# Altium PCB Memory Address Decoder.PcbDoc
Units mil, origin at the board's own origin, x right, y up, seen from the top; angles counter-clockwise.
Board outline 5200 x 2700 mil, 2 copper layers (Top Layer, Bottom Layer), stack 61.756 mil thick; 19 components, 62 nets, 171 pads, 159 vias.
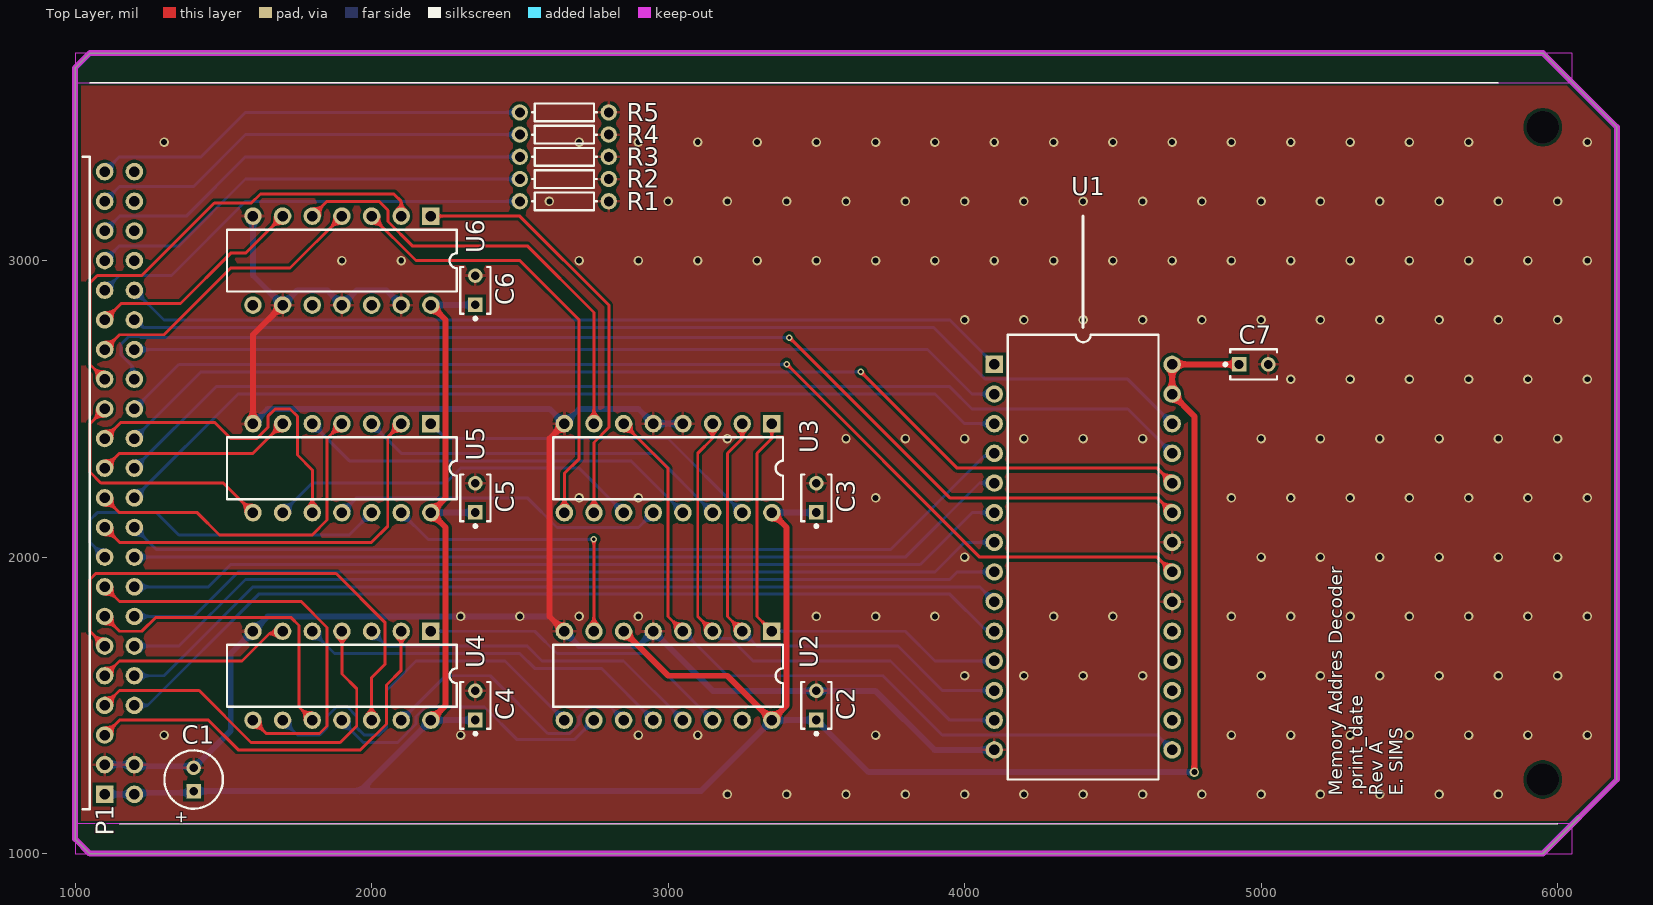
[diagram p0: Top Layer view]
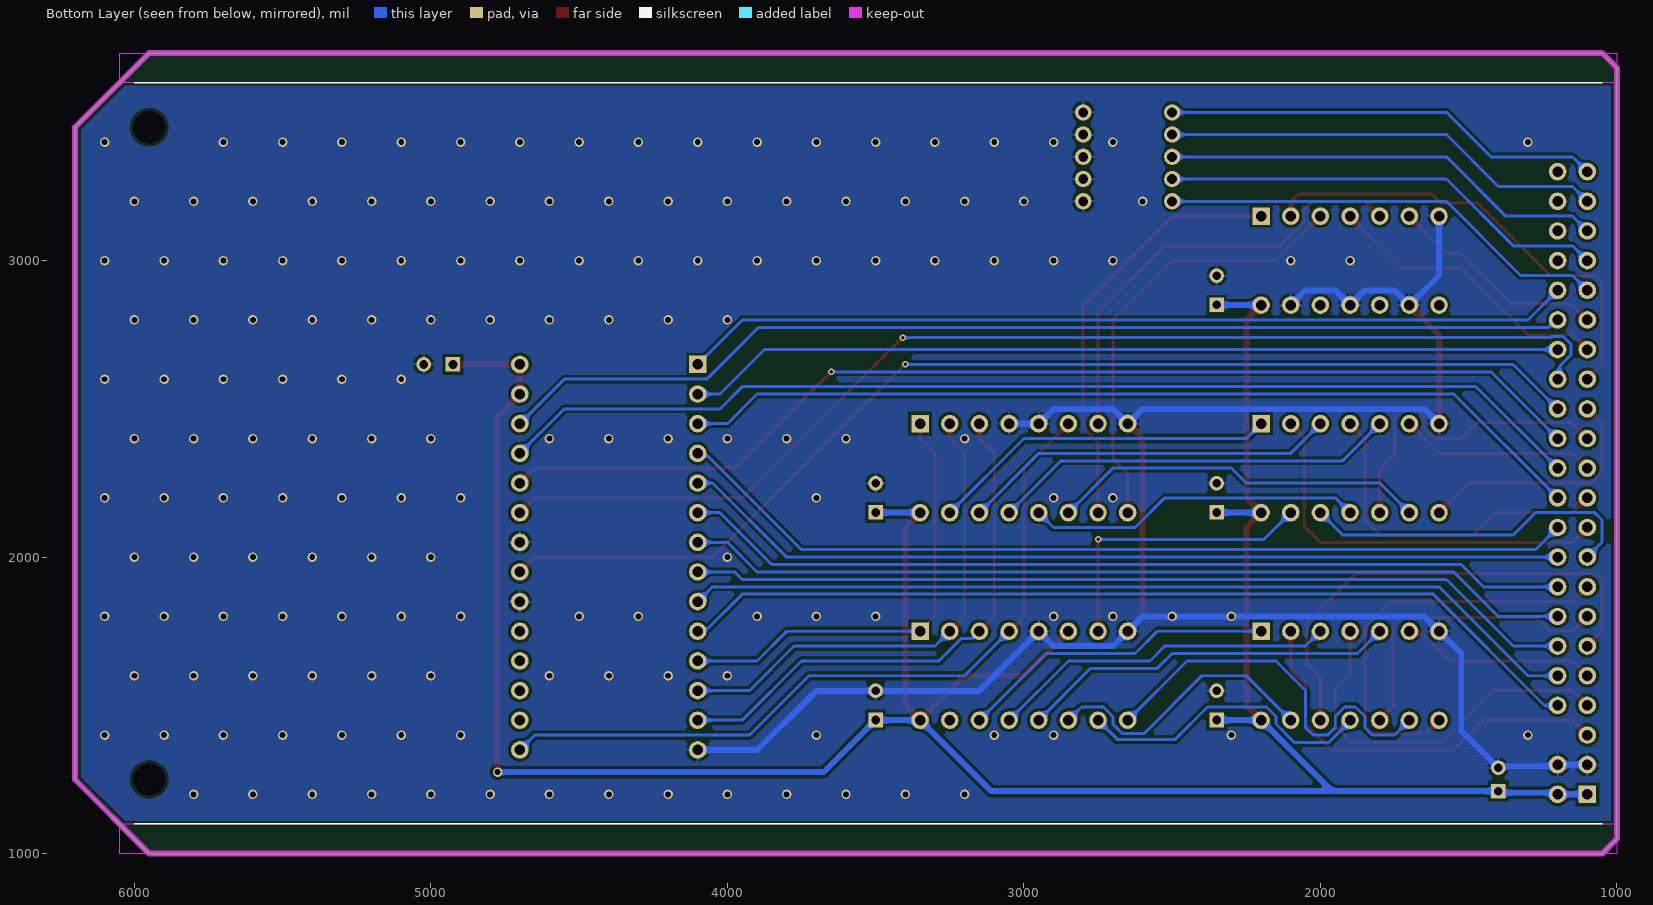
[diagram p1: Bottom Layer view, seen from below]

## Layer stack, top to bottom
Top Solder: solder mask 1, SM-001, Dk 4
Top Layer: signal copper 1.378
Dielectric 1: core 59, Core-043, Dk 4.3
Bottom Layer: signal copper 1.378
Bottom Solder: solder mask 1, SM-001, Dk 4

## Board outline
1000,3650 1050,3700 5950,3700 6200,3450 6200,1250 5950,1000 1050,1000 1000,1050

## Design rules (kind name [scope] priority, off if disabled: settings)
Clearance [All] p1: gap=10 ignorepadtopadclearanceinfootprint=FALSE except(0: Arc-Hole Track-Hole SMDPad-Hole THPad-Hole Via-Hole Fill-Hole Poly-Hole Region-Hole Text-Hole)
HoleSize [All] p1: absolutevalues=TRUE maxlimit=200 minlimit=1 maxpercent=80.000 minpercent=20.000
PolygonConnect [All] p1: thpad.connectstyle=Relief thpad.reliefconductorwidth=10 thpad.reliefentries=4 thpad.polygonreliefangle="90 Angle" thpad.airgapwidth=10 smdpad.connectstyle=Relief smdpad.reliefconductorwidth=10 smdpad.reliefentries=4 smdpad.polygonreliefangle="90 Angle" smdpad.airgapwidth=10 via.connectstyle=Direct via.reliefconductorwidth=10 via.reliefentries=4 via.polygonreliefangle="90 Angle" via.airgapwidth=10
RoutingVias "Schematic Routing Via Style" [InNetClass('PWR')] p1: holewidth=20 width=35 viastyle="Through Hole" minholewidth=20 minwidth=35 maxholewidth=20 maxwidth=50
RoutingVias [All] p2: holewidth=12 width=22 viastyle="Through Hole" minholewidth=12 minwidth=22 maxholewidth=50 maxwidth=50
SilkToSilkClearance [All] p1: silktosilkclearance=5
SilkToSolderMaskClearance [IsPad] p1: minsilkscreentomaskgap=5 clearancetoexposedcopper=FALSE
SolderMaskExpansion [All] p1: expansion=4 istentingtop=FALSE
Width "Schematic Width Constraint" [InNetClass('PWR')] p1: maxlimit=50 minlimit=20 preferedwidth=20
Width [All] p2: maxlimit=10 minlimit=10 preferedwidth=10
27 further rules are at their usual default settings.

## Classes and differential pairs
net class PWR: GND VCC
net class EN[1..20]: EN1 EN2 EN3 EN4 EN5 EN6 EN7 EN8 EN9 EN10 EN11 EN12 EN13 EN14 EN15 EN16 EN17 EN18 EN19 EN20
net class ADDR[0..19]: ADDR0 ADDR1 ADDR2 ADDR3 ADDR4 ADDR5 ADDR6 ADDR7 ADDR8 ADDR9 ADDR10 ADDR11 ADDR12 ADDR13 ADDR14 ADDR15 ADDR16 ADDR17 ADDR18 ADDR19
component class Top: C1 P1
component class Decode: C2 C3 C4 C5 C6 C7 R1 R2 R3 R4 R5 U2 U3 U4 U5 U6

## Components (designator, comment, footprint, x,y, rotation, side; value= is the part's Value field where it differs from the comment)
C1 "Cap Pol5" C5x7 1400,1250 r90 top value=10uF
C2 "K104K15X7RF5TL2" VISH-K104K15X7RF5TL2 3500,1500 r90 top
C3 "K104K15X7RF5TL2" VISH-K104K15X7RF5TL2 3500,2200 r90 top
C4 "K104K15X7RF5TL2" VISH-K104K15X7RF5TL2 2350,1500 r90 top
C5 "K104K15X7RF5TL2" VISH-K104K15X7RF5TL2 2350,2200 r90 top
C6 "K104K15X7RF5TL2" VISH-K104K15X7RF5TL2 2350,2900 r90 top
C7 "K104K15X7RF5TL2" VISH-K104K15X7RF5TL2 4975,2650 r0 top
P1 "Memory Address Decoder" HDR2X22H 1100,1200 r90 top
R1 "Res1" AXIAL-0.3 2650,3200 r180 top value=10k
R2 "Res1" AXIAL-0.3 2650,3275 r180 top value=10k
R3 "Res1" AXIAL-0.3 2650,3350 r180 top value=10k
R4 "Res1" AXIAL-0.3 2650,3425 r180 top value=10k
R5 "Res1" AXIAL-0.3 2650,3500 r180 top value=10k
U1 "AT28C256-15PU" J028 4400,2000 r270 top
U2 "SN74LS138N" N016 3000,1600 r180 top
U3 "SN74LS138N" N016 3000,2300 r180 top
U4 "SN74LS04N" N014 1900,1600 r180 top
U5 "SN74LS04N" N014 1900,2300 r180 top
U6 "SN74LS04N" N014 1900,3000 r180 top

## Footprints (in the part's own frame and the unit in brackets; to place one, negate y for a bottom-side part, rotate by r counter-clockwise, add the part's x,y. Pads: shape width x height; smd on the part's side, far side on the other; paste and mask are expansions set on the pad)
AXIAL-0.3 [mm] "Axial Device, Thru-Hole; 2 Leads; 0.3 in Pin Spacing"
  round 1.4 hole 0.85: 1(-3.81,0) 2(3.81,0)
  silkscreen extent -2.77,-0.76 2.77,0.76
C5x7 [mm] "Capacitor; 2 Leads"
  rect 1.25x1.25 hole 0.75: 1(-1,0)
  round 1.25 hole 0.75: 2(1,0)
  silkscreen extent -2.5,-2.5 2.5,2.5, body extent -2.5,-2.5 2.5,2.5, height 7
HDR2X22H [mm] "Connector; Header; 22x2 Position; Right Angle"
  rect 1.5x1.5 hole 0.9: 1(0,0)
  round 1.5 hole 0.9: 2(0,-2.54) 3(2.54,0) 4(2.54,-2.54) 5(5.08,0) 7(7.62,0) 8(7.62,-2.54) 9(10.16,0) 10(10.16,-2.54) 11(12.7,0) 12(12.7,-2.54) 13(15.24,0) 14(15.24,-2.54) 15(17.78,0) 16(17.78,-2.54) 17(20.32,0) 18(20.32,-2.54) 19(22.86,0) 20(22.86,-2.54) 21(25.4,0) 22(25.4,-2.54) 23(27.94,0) 24(27.94,-2.54) 25(30.48,0) 26(30.48,-2.54) 27(33.02,0) 28(33.02,-2.54) 29(35.56,0) 30(35.56,-2.54) 31(38.1,0) 32(38.1,-2.54) 33(40.64,0) 34(40.64,-2.54) 35(43.18,0) 36(43.18,-2.54) 37(45.72,0) 38(45.72,-2.54) 39(48.26,0) 40(48.26,-2.54) 41(50.8,0) 42(50.8,-2.54) 43(53.34,0) 44(53.34,-2.54)
  silkscreen extent -1.27,1.27 54.61,1.91
J028 [mm] "DIP; 28 Leads; Row Spacing 15.24 mm; Pitch 2.54 mm"
  rect 1.5x1.5 hole 0.9: 1(-16.51,-7.62)
  round 1.5 hole 0.9: 2(-13.97,-7.62) 3(-11.43,-7.62) 4(-8.89,-7.62) 5(-6.35,-7.62) 6(-3.81,-7.62) 7(-1.27,-7.62) 8(1.27,-7.62) 9(3.81,-7.62) 10(6.35,-7.62) 11(8.89,-7.62) 12(11.43,-7.62) 13(13.97,-7.62) 14(16.51,-7.62) 15(16.51,7.62) 16(13.97,7.62) 17(11.43,7.62) 18(8.89,7.62) 19(6.35,7.62) 20(3.81,7.62) 21(1.27,7.62) 22(-1.27,7.62) 23(-3.81,7.62) 24(-6.35,7.62) 25(-8.89,7.62) 26(-11.43,7.62) 27(-13.97,7.62) 28(-16.51,7.62)
  silkscreen extent -19.05,-6.45 19.05,6.45
N014 [mm] "DIP; 14 Leads; Row Spacing 7.62 mm; Pitch 2.54 mm"
  rect 1.5x1.5 hole 0.9: 1(-7.62,-3.81)
  round 1.5 hole 0.9: 2(-5.08,-3.81) 3(-2.54,-3.81) 4(0,-3.81) 5(2.54,-3.81) 6(5.08,-3.81) 7(7.62,-3.81) 8(7.62,3.81) 9(5.08,3.81) 10(2.54,3.81) 11(0,3.81) 12(-2.54,3.81) 13(-5.08,3.81) 14(-7.62,3.81)
  silkscreen extent -9.85,-2.65 9.85,2.65, body extent -9.15,-5.08 9.15,5.12, height 7.88
N016 [mm] "DIP; 16 Leads; Row Spacing 7.62 mm; Pitch 2.54 mm"
  rect 1.5x1.5 hole 0.9: 1(-8.89,-3.81)
  round 1.5 hole 0.9: 2(-6.35,-3.81) 3(-3.81,-3.81) 4(-1.27,-3.81) 5(1.27,-3.81) 6(3.81,-3.81) 7(6.35,-3.81) 8(8.89,-3.81) 9(8.89,3.81) 10(6.35,3.81) 11(3.81,3.81) 12(1.27,3.81) 13(-1.27,3.81) 14(-3.81,3.81) 15(-6.35,3.81) 16(-8.89,3.81)
  silkscreen extent -9.85,-2.65 9.85,2.65, body extent -10.46,-5.08 10.46,5.12, height 7.88
VISH-K104K15X7RF5TL2 [mm] "THD, 2-Leads, Body 4x2.6mm"
  rect 1.25x1.25 hole 0.75: 1(-1.25,0)
  round 1.25 hole 0.75: 2(1.25,0)
  silkscreen extent -2.55,-1.3 2,1.3, body extent -2,-1.3 2,1.3, height 5.6

## Part data
C1: "Polarized Capacitor", LatestRevisionDate=17-Jul-2002, LatestRevisionNote="Re-released for DXP Platform.", PackageDescription="Polarized Capacitor; 2 Leads", PackageReference=POLAR0.8, Published=8-Jun-2000, Publisher="Altium Limited"
C2 C3 C4 C5 C6 C7: library part CMP-2000-06508-1, "Ceramic Capacitor, 100 nF, +/- 10%, 50 V, -55 to 125 degC, 2-Pin THD, RoHS, Tape and Reel", Capacitance=0.1µF, Manufacturer=Vishay, Operating Temperature=-55°C~125°C, Package / Case=Radial, Package Description="2-Pin Through Hole Device, Body 4 x 2.6 mm", Ratings=-, Standard Package=1, Temperature Coefficient=X7R, Tolerance=±10%, Voltage - Rated=50V, Applications=GeneralPurpose, Catalog Drawings=Mono-KapSide2-15_5.58Mono-KapSide1_15, Category=Capacitors, Datasheet URL=http://www.vishay.com/docs/45171/kseries.pdf, Datasheet Version=08/2013, Family=CeramicCapacitors, Features=-, Height - Seated (Max)="0.220\"(5.58mm)", Lead Spacing="0.098\"(2.50mm)", Lead Style=Straight, Manufacturer URL=http://www.vishay.com/, Mounting Technology=ThroughHole, Mounting Type=ThroughHole, Online Catalog=Mono-Kap™Series, Other Names=BC1084CT, Package Reference=K104K15X7RF5TL2, Packaging=CutTape(CT), Series=Mono-Kap™K, Size / Dimension="0.157\"Lx0.098\"W(4.00mmx2.50mm)", Thickness (Max)=-
P1: library part "Header 22X2H", "Header, 22-Pin, Dual row, Right Angle", LatestRevisionDate=17-Jul-2002, LatestRevisionNote="Re-released for DXP Platform.", Publisher="Altium Limited", System=Connector
R1 R2 R3 R4 R5: "Resistor", LatestRevisionDate=17-Jul-2002, LatestRevisionNote="Re-released for DXP Platform.", PackageDescription="Axial Device, Thru-Hole; 2 Leads; 0.3 in Pin Spacing", PackageReference=AXIAL-0.3, Published=8-Jun-2000, Publisher="Altium Limited"
U2 U3: "3-Line to 8-Line Decoder / Demultiplexer", Code_JEDEC=MS-001-BB, ComponentLink1Description="Manufacturer Link", ComponentLink1URL=http://www.ti.com/, ComponentLink2Description=Datasheet, ComponentLink2URL=http://www-s.ti.com/sc/ds/sn74ls138.pdf, DatasheetVersion=Mar-1988, LatestRevisionDate=04-Mar-2005, LatestRevisionNote="Stylized 3D Model Added.", PackageDescription="DIP; 16 Leads; Row Spacing 7.62 mm; Pitch 2.54 mm", PackageReference=N016, PackageVersion=Oct-1995, Published=8-Jun-2000, Publisher="Altium Limited"
U4 U5 U6: "Hex Inverter", ComponentLink1Description="Manufacturer Link", ComponentLink1URL=http://www.ti.com/, ComponentLink2Description=Datasheet, ComponentLink2URL=http://www-s.ti.com/sc/ds/sn74ls04.pdf, DatasheetVersion=Mar-1988, LatestRevisionDate=04-Mar-2005, LatestRevisionNote="Stylized 3D Model Added.", PackageDescription="DIP; 14 Leads; Row Spacing 7.62 mm; Pitch 2.54 mm", PackageReference=N014, PackageVersion=Oct-1995, Published=8-Jun-2000, Publisher="Altium Limited"

## Free pads (board coordinates)
  round 0 hole 109: ""(5950,1250) ""(5950,3450)

## Via types
v1: diameter 32, hole 20, Top Layer to Bottom Layer, tented both sides, 155 vias
v2: diameter 22, hole 12, Top Layer to Bottom Layer, tented both sides, 4 vias

## Nets (pads, with @x,y where several pads share a name; then routed paths per layer and width w, separated by ;. In a path a pad name is that pad's centre, name@x,y a point inside that pad or via, vN(x,y) a via of type N, cw(c..) or ccw(c..) an arc to the next point about the centre after c; other vN are vias at no path point)
ADDR0: 
ADDR1: P1.8 U1.10 | length 3107.1
  Bottom Layer w10: P1.8 1244.14,1500 1619.14,1875 3950,1875 4066.01,1758.99 4091.01,1758.99 U1.10
ADDR2: P1.10 U1.9 | length 3045
  Bottom Layer w10: P1.10 1300,1600 1600,1900 4050,1900 U1.9
ADDR3: P1.12 U1.8 | length 3003.6
  Bottom Layer w10: P1.12 1350,1700 1575,1925 3950,1925 3975,1950 U1.8
ADDR4: P1.14 U1.7 | length 3003.6
  Bottom Layer w10: P1.14 1400,1800 1550,1950 3900,1950 4000,2050 U1.7
ADDR5: P1.16 U1.6 | length 3003.6
  Bottom Layer w10: P1.16 1450,1900 1525,1975 3850,1975 4025,2150 U1.6
ADDR6: P1.18 U1.5 | length 3003.6
  Bottom Layer w10: P1.18 3800,2000 4050,2250 U1.5
ADDR7: P1.20 U1.4 | length 3065.7
  Bottom Layer w10: P1.20 1275,2025 3750,2025 4066.01,2341.01 4091.01,2341.01 U1.4
ADDR8: P1.22 U1.3 | length 3086.4
  Bottom Layer w10: P1.22 1550,2550 3900,2550 4000,2450 U1.3
ADDR9: P1.24 U1.25 | length 3707.1
  Bottom Layer w10: P1.24 1475,2575 3950,2575 4025,2500 4550,2500 U1.25
ADDR10: P1.26 U1.24 | length 3748.5
  Top Layer w10: v2(3650,2625) 3975,2300 4650,2300 U1.24
  Bottom Layer w10: P1.26 1425,2625 v2(3650,2625)
ADDR11: P1.28 U1.21 | length 3852.9
  Top Layer w10: v2(3400,2651) 4051,2000 4650,2000 U1.21
  Bottom Layer w10: P1.28 1350,2650 3399,2650 v2(3400,2651)
ADDR12: P1.30 U1.23 | length 3938.5
  Top Layer w10: v2(3408.38,2740) 3410,2740 3950,2200 4650,2200 U1.23
  Bottom Layer w10: P1.30 1192.5,2607.5 1192.5,2644.53 1155.47,2681.56 1155.47,2718.44 1181.56,2744.53 1218.44,2744.53 1222.97,2740 v2(3408.38,2740)
ADDR13: P1.32 U1.2 | length 2962.1
  Bottom Layer w10: P1.32 3875,2700 4025,2550 U1.2
ADDR14: P1.34 U1.26 | length 3645
  Bottom Layer w10: P1.34 1204.69,2800 1229.69,2775 3894.73,2775 3982.13,2687.6 4069.73,2600 4550,2600 U1.26
ADDR15: P1.36 U1.1 | length 3003.6
  Bottom Layer w10: P1.36 1300,2800 3950,2800 U1.1
ADDR16: P1.38
ADDR17: P1.40
ADDR18: P1.42
ADDR19: P1.44
AN0: U1.11 U2.1 U3.1 | length 1532.8
  Top Layer w10: U2.1 3300,1800 3300,2350 3350,2400 U3.1
  Bottom Layer w10: U2.1 3800,1750 3900,1650 U1.11
AN1: U1.12 U2.2 U3.2 | length 1674.3
  Top Layer w10: U2.2 3200,1800 3200,2350 3250,2400 U3.2
  Bottom Layer w10: U2.2 3300,1700 3775,1700 3925,1550 U1.12
AN2: U1.13 U2.3 U3.3 | length 1815.7
  Top Layer w10: U2.3 3100,1800 3100,2350 3150,2400 U3.3
  Bottom Layer w10: U2.3 3175,1725 3212.03,1725 3287.03,1650 3750,1650 3950,1450 U1.13
AN3: U1.15 U2.4 U3.6 | length 2598.5
  Top Layer w10: U3.6 3000,2300 3000,1800 U2.4
  Bottom Layer w10: U2.4 3200,1600 3725,1600 3925,1400 4650,1400 U1.15
EN0#: U2.15
EN1: P1.5 U4.2 | length 1381.9
  Top Layer w10: P1.5 1150,1450 1450,1450 1550,1350 1962.97,1350 2050,1437.03 2050,1568.36 2100,1618.36 U4.2
EN1#: U2.14 U4.1 | length 1074.3
  Bottom Layer w10: U4.1 2550,1750 2625,1675 2925,1675 U2.14
EN2: P1.7 U4.4 | length 1306.2
  Top Layer w10: P1.7 1150,1550 1418.6,1550 1593.6,1375 1894.14,1375 1950,1430.86 1950,1555.86 1900,1605.86 U4.4
EN2#: U2.13 U4.3 | length 1174.3
  Bottom Layer w10: U4.3 2050,1700 2525,1700 2575,1650 2850,1650 U2.13
EN3: P1.9 U4.6 | length 662.1
  Top Layer w10: P1.9 1150,1650 1562.97,1650 1655.47,1742.5 1692.5,1742.5 U4.6
EN3#: U2.12 U4.5 | length 1274.3
  Bottom Layer w10: U4.5 1875,1675 2500,1675 2550,1625 2775,1625 U2.12
EN4: P1.11 U4.12 | length 1665.2
  Top Layer w10: P1.11 1050,1750 1050,1925 1069.53,1944.53 1880.47,1944.53 2044.53,1780.47 2044.53,1638.12 2000,1593.6 U4.12
EN4#: U2.11 U4.13 | length 963.2
  Bottom Layer w10: U4.13 2250,1600 2400,1600 2594.53,1405.47 2668.44,1405.47 2700,1437.03 2700,1462.97 2731.56,1494.53 2805.47,1494.53 U2.11
EN5: P1.13 U4.10 | length 1044.1
  Top Layer w10: P1.13 1150,1750 1225,1750 1270.86,1795.86 1729.14,1795.86 1755.47,1769.53 1755.47,1494.53 U4.10
EN5#: U2.10 U4.11 | length 1019.6
  Bottom Layer w10: U4.11 1900,1446.72 1971.72,1375 2087.97,1375 2150,1437.03 2150,1462.97 2181.56,1494.53 2380.47,1494.53 2489.53,1385.47 2685.47,1385.47 U2.10
EN6: P1.15 U4.8 | length 1417.8
  Top Layer w10: P1.15 1150,1850 1762.97,1850 1850,1762.97 1850,1430.86 1824.61,1405.47 1644.53,1405.47 U4.8
EN6#: U2.9 U4.9 | length 1353.1
  Bottom Layer w10: U4.9 1750,1400 1825,1400 1850,1425 1850,1462.97 1881.56,1494.53 1918.44,1494.53 1950,1462.97 1950,1425 1975,1400 2025,1400 2050,1425 2050,1550 2150,1650 2450,1650 U2.9
EN7: P1.17 U5.12 | length 1168.2
  Bottom Layer w10: P1.17 1050,2050 1050,2125 1075,2150 1275,2150 1350,2075 1925,2075 U5.12
EN7#: U2.7 U5.13 | length 997.3
  Top Layer w10: U2.7 v2(2750,2060)
  Bottom Layer w10: U5.13 2190,2060 v2(2750,2060)
EN8: P1.19 U5.2 | length 1362.1
  Top Layer w10: P1.19 1150,2050 2000,2050 2054.53,2104.53 2054.53,2404.53 U5.2
EN8#: U3.15 U5.1 | length 1174.3
  Bottom Layer w10: U5.1 2250,2400 3000,2400 U3.15
EN9: P1.21 U5.4 | length 1168.2
  Top Layer w10: P1.21 1150,2150 1412.5,2150 1487.5,2075 1800,2075 1850,2125 1850,2400 U5.4
EN9#: U3.14 U5.3 | length 1274.3
  Bottom Layer w10: U5.3 2100,2350 2950,2350 U3.14
EN10: P1.23 U5.6 | length 662.1
  Top Layer w10: P1.23 1150,2350 1600,2350 U5.6
EN10#: U3.13 U5.5 | length 1374.3
  Bottom Layer w10: U5.5 1925,2325 2875,2325 U3.13
EN11: P1.25 U5.10 | length 1115
  Top Layer w10: P1.25 1154.69,2454.69 1470.31,2454.69 1525,2400 1612.97,2400 1650,2437.03 1650,2475 1675,2500 1725,2500 1750,2475 1750,2344.14 1800,2294.14 U5.10
EN11#: U3.12 U5.11 | length 1132.8
  Bottom Layer w10: U5.11 1950,2200 2525,2200 2625,2100 2900,2100 U3.12
EN12: P1.27 U5.8 | length 840.4
  Top Layer w10: P1.27 1050,2450 1050,2287.03 1087.03,2250 1500,2250 U5.8
EN12#: U3.11 U5.9 | length 1274.3
  Bottom Layer w10: U5.9 1800,2250 2250,2250 2300,2300 2700,2300 U3.11
EN13: P1.29 U6.2 | length 1580.3
  Top Layer w10: P1.29 1050,2650 1050,2925 1075,2950 1225,2950 1469.53,3194.53 1594.53,3194.53 1625,3225 2075,3225 2100,3200 U6.2
EN13#: U3.10 U6.1 | length 1445
  Top Layer w10: U6.1 2500,3150 2800,2850 2800,2437.03 2750,2387.03 U3.10
EN14: P1.31 U6.4 | length 986.4
  Top Layer w10: P1.31 1150,2750 1300,2750 1525,2975 1725,2975 U6.4
EN14#: U3.9 U6.3 | length 1515.7
  Top Layer w10: U6.3 2150,3000 2500,3000 2700,2800 2700,2331.64 2650,2281.64 U3.9
EN15: P1.33 U6.6 | length 745
  Top Layer w10: P1.33 1155.47,2855.47 1355.47,2855.47 1525,3025 1575,3025 U6.6
EN15#: U3.7 U6.5 | length 1523.3
  Top Layer w10: U6.5 1850,3200 2025,3200 2055.47,3169.53 2055.47,3131.56 2137.03,3050 2525,3050 2750,2825 U3.7
EN16: P1.35 R1.2 | length 1524.3
  Bottom Layer w10: P1.35 1150,2950 1325,2950 1575,3200 R1.2
EN17: P1.37 R2.2 | length 1513.9
  Bottom Layer w10: P1.37 1150,3050 1350,3050 1575,3275 R2.2
EN18: P1.39 R3.2 | length 1503.6
  Bottom Layer w10: P1.39 1150,3150 1375,3150 1575,3350 R3.2
EN19: P1.41 R4.2 | length 1493.2
  Bottom Layer w10: P1.41 1150,3250 1400,3250 1575,3425 R4.2
EN20: P1.43 R5.2 | length 1482.8
  Bottom Layer w10: P1.43 1150,3350 1425,3350 1575,3500 R5.2
GND: C1.2 C2.2 C3.2 C4.2 C5.2 C6.2 C7.2 P1.3 P1.4 R1.1 R2.1 R3.1 R4.1 R5.1 U1.14 U1.20 U1.22 U2.5 U2.8 U3.4 U3.5 U3.8 U4.7 U5.7 U6.7 U6.9 U6.11 U6.13 | length 7134
  Top Layer w20: U5.7 1600,2750 U6.9 ; U2.8 2600,1800 2600,2400 U3.8
  Bottom Layer w20: P1.3 P1.4 1205.31,1294.69 1394.68,1294.69 C1.2 1525,1414.37 1525,1675 U4.7 1649.53,1799.53 2600.47,1799.53 U2.8 2699.53,1700.47 2900.47,1700.47 U2.5 3150.79,1549.21 C2.2 3699.06,1549.21 3898.27,1350 U1.14 ; U5.7 1649.53,2499.53 2600.47,2499.53 U3.8 2699.53,2499.53 2900.47,2499.53 U3.5 U3.4 ; U6.7 1600,2950 U6.9 1749.53,2899.53 1850.47,2899.53 U6.11 1949.53,2899.53 2050.47,2899.53 U6.13
  other v1: 3200,1200 3400,1200 3600,1200 3800,1200 4000,1200 4200,1200 4400,1200 4600,1200 4800,1200 5000,1200 5200,1200 5400,1200 5600,1200 5800,1200 1300,1400 2300,1400 2900,1400 3100,1400 3700,1400 4900,1400 5100,1400 5300,1400 5500,1400 5700,1400 5900,1400 6100,1400 4000,1600 4200,1600 4400,1600 4600,1600 5000,1600 5200,1600 5400,1600 5600,1600 5800,1600 6000,1600 2300,1800 2500,1800 2700,1800 2900,1800 3500,1800 3700,1800 3900,1800 4300,1800 4500,1800 4900,1800 5100,1800 5300,1800 5500,1800 5700,1800 5900,1800 6100,1800 4000,2000 5000,2000 5200,2000 5400,2000 5600,2000 5800,2000 6000,2000 2700,2200 2900,2200 3700,2200 4900,2200 5100,2200 5300,2200 5500,2200 5700,2200 5900,2200 6100,2200 3200,2400 3600,2400 3800,2400 4000,2400 4200,2400 4400,2400 4600,2400 5000,2400 5200,2400 5400,2400 5600,2400 5800,2400 6000,2400 5100,2600 5300,2600 5500,2600 5700,2600 5900,2600 6100,2600 4000,2800 4200,2800 4400,2800 4600,2800 4800,2800 5000,2800 5200,2800 5400,2800 5600,2800 5800,2800 6000,2800 1900,3000 2100,3000 2700,3000 2900,3000 3100,3000 3300,3000 3500,3000 3700,3000 3900,3000 4100,3000 4300,3000 4500,3000 4700,3000 4900,3000 5100,3000 5300,3000 5500,3000 5700,3000 5900,3000 6100,3000 2600,3200 3000,3200 3200,3200 3400,3200 3600,3200 3800,3200 4000,3200 4200,3200 4400,3200 4600,3200 4800,3200 5000,3200 5200,3200 5400,3200 5600,3200 5800,3200 6000,3200 1300,3400 2700,3400 2900,3400 3100,3400 3300,3400 3500,3400 3700,3400 3900,3400 4100,3400 4300,3400 4500,3400 4700,3400 4900,3400 5100,3400 5300,3400 5500,3400 5700,3400 6100,3400
VCC: C1.1 C2.1 C3.1 C4.1 C5.1 C6.1 C7.1 P1.1 P1.2 U1.27 U1.28 U2.6 U2.16 U3.16 U4.14 U5.14 U6.14 | length 9271.9
  Top Layer w20: U4.14 2250,1500 2250,2100 U5.14 2250,2200 2250,2800 U6.14 ; U2.6 3000,1600 3200,1600 U2.16 3400,1500 3400,2100 U3.16 ; v1(4775,1275) 4775,2475 U1.27 U1.28 C7.1
  Bottom Layer w20: P1.1 P1.2 1205.32,1205.32 1394.68,1205.32 C1.1 1960.63,1210.63 ; U5.14 2200.39,2150.39 2349.61,2150.39 C5.1 ; U6.14 2200.39,2850.39 2349.61,2850.39 C6.1 ; C4.1 2349.61,1450.39 2200.39,1450.39 U4.14 1960.63,1210.63 ; U3.16 3350.39,2150.39 3499.61,2150.39 C3.1 ; v1(4775,1275) 3675.79,1275 C2.1 3499.61,1450.39 3350.39,1450.39 U2.16 3110.63,1210.63 1960.63,1210.63
pads on no net: U1.16 U1.17 U1.18 U1.19 U6.8 U6.10 U6.12

## Polygon pours and split planes (outlines as drawn)
GND on Bottom Layer "GND_L02_P000" (solid, remove dead copper, pour order 0): 1000,1000 1000,3700 6200,3700 6200,1000
GND on Top Layer "GND_L01_P001" (solid, remove dead copper, pour order 1): 1000,1000 1000,3700 6200,3700 6200,1000

## Keep-outs
Top Layer:
  rectangle: 1000,1000 6050,1100
  rectangle: 1000,3600 6050,3700
Bottom Layer:
  rectangle: 1000,3600 6050,3700
  rectangle: 1000,1000 6050,1100
Keep-Out Layer:
  the board outline again, w20

## Silkscreen, mask and mechanical layers (free items; w line width, h text height)
Top Overlay:
  lines w5: 1050,3600 5800,3600 ; 1150,1100 6000,1100
  lines w10: 4400,2775 4400,3150
  text "Memory Addres Decoder / .print_date / Rev A / E. SIMS" at 5476.91,1195 h45 r90
Bottom Overlay:
  lines w5: 1050,1100 6000,1100 ; 1050,3600 6000,3600

## Text inside footprints (layer, text, board x,y; h text height)
C1: Top Overlay "+" at 1340.63,1145.22 h40 r270